# Altium PCB PCB1.pcbdoc
Units mil, origin at the board's own origin, x right, y up, seen from the top; angles counter-clockwise.
Board outline 2782.99 x 3611.5 mil, 2 copper layers (Top Layer, Bottom Layer); 21 components, 41 nets, 137 pads, 9 vias.
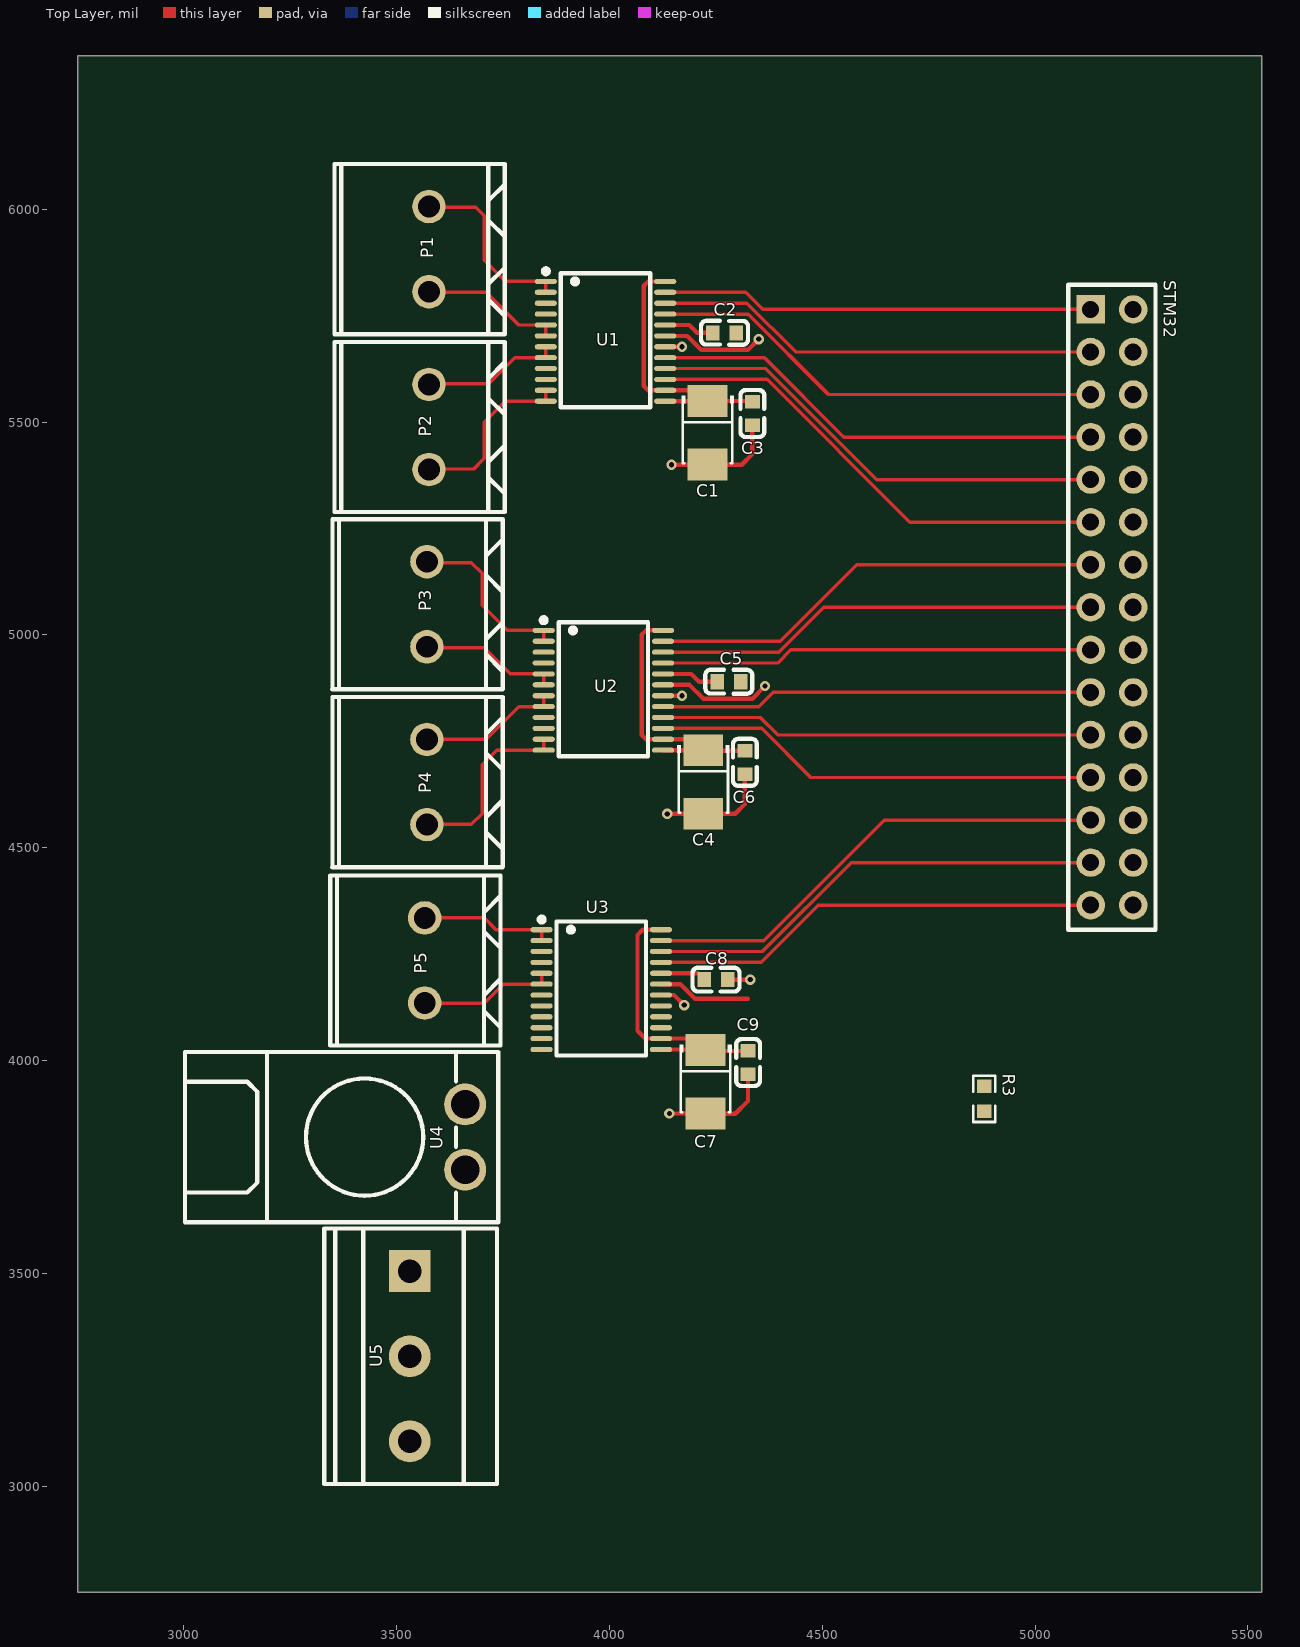
[diagram p0: Top Layer view]
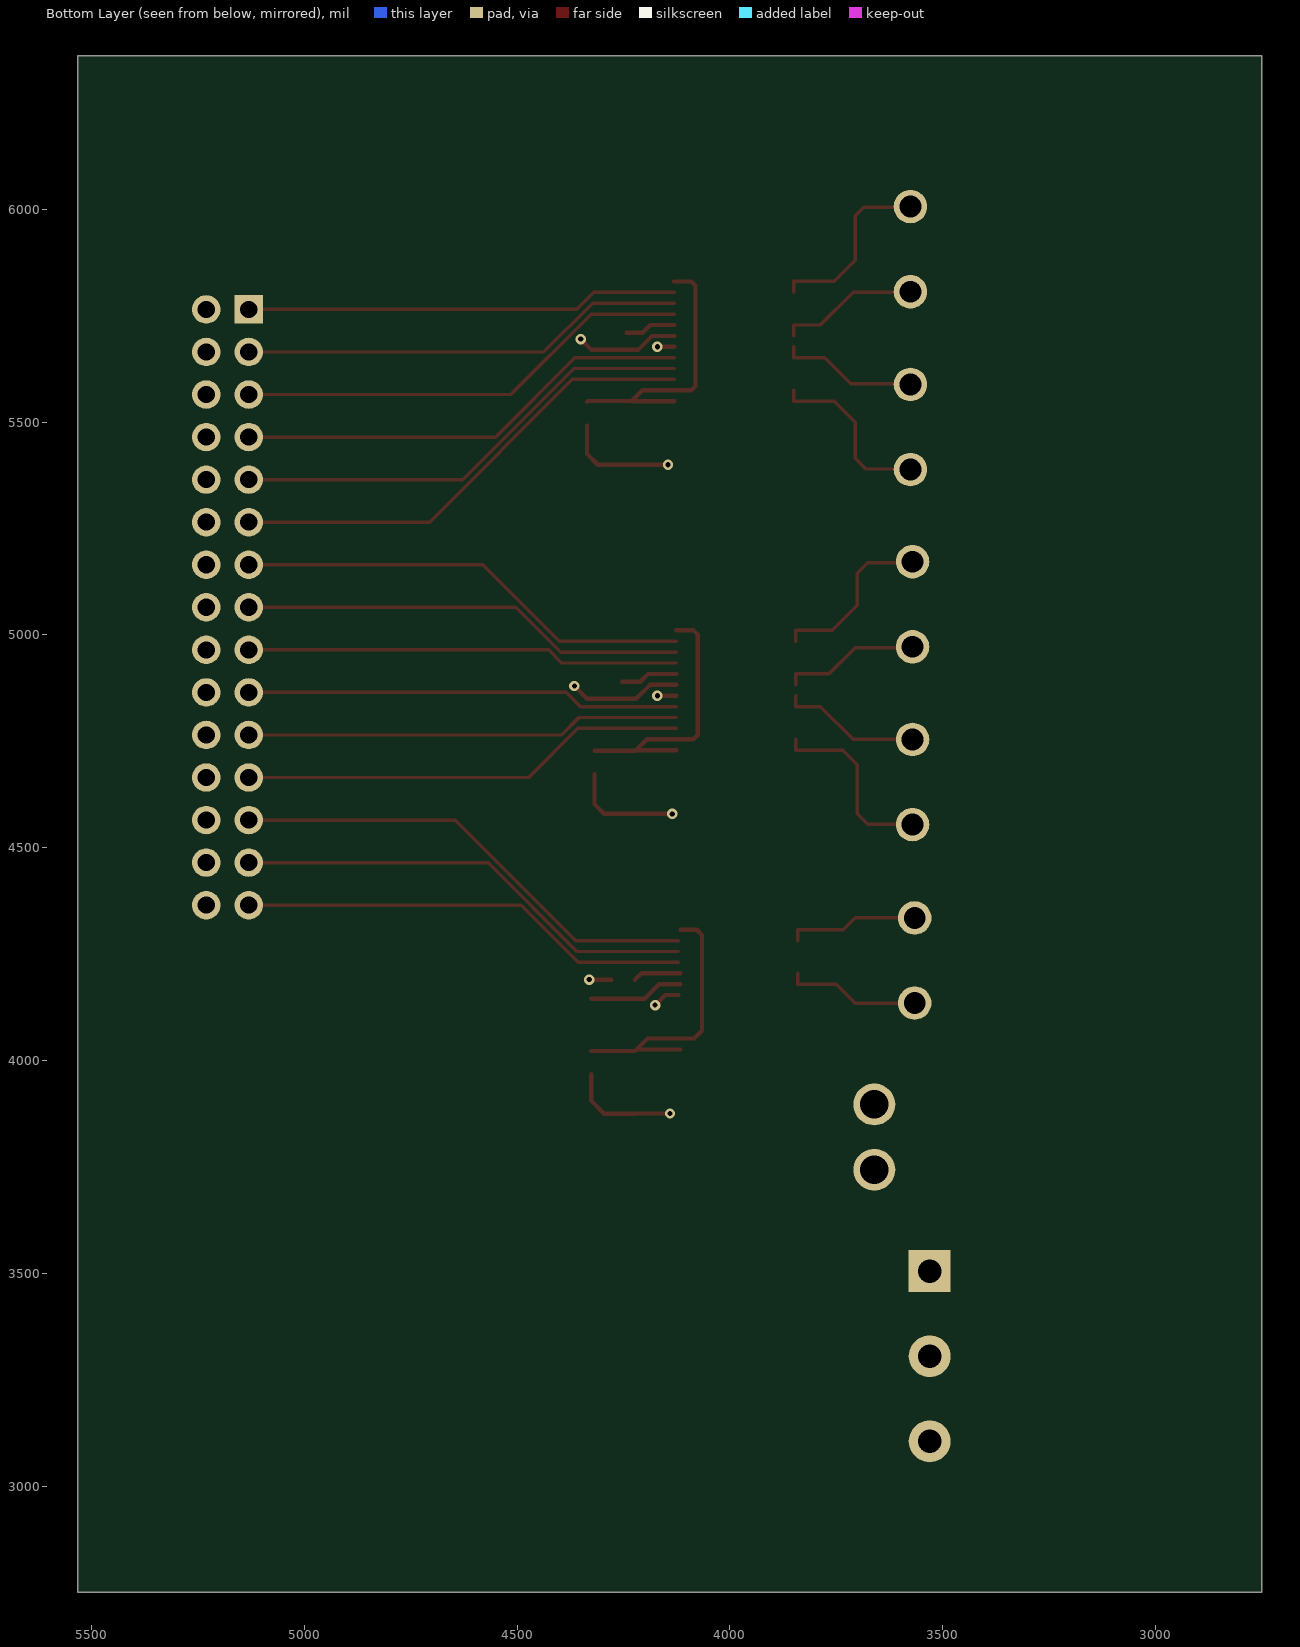
[diagram p1: Bottom Layer view, seen from below]

## Layer stack, top to bottom
Top Layer: signal copper (thickness not stored)
Dielectric: dielectric 12.6, FR-4, Dk 4.8
Bottom Layer: signal copper (thickness not stored)

## Board outline
5532.99,2750 2750,2750 2750,6361.5 5532.99,6361.5

## Components (designator, comment, footprint, x,y, rotation, side; value= is the part's Value field where it differs from the comment)
C1 "TAJB106K025RNJ" CAP-SMD_L3.5-W2.8-R-RD 4230.63,5475 r90 top
C2 "CAP_0603" C0603 4270.63,5710 r0 top
C3 "CAP_0603" C0603 4335.63,5520 r270 top
C4 "TAJB106K025RNJ" CAP-SMD_L3.5-W2.8-R-RD 4220.38,4654.44 r90 top
C5 "CAP_0603" C0603 4280.63,4890 r0 top
C6 "CAP_0603" C0603 4318.07,4700.49 r270 top
C7 "TAJB106K025RNJ" CAP-SMD_L3.5-W2.8-R-RD 4225.63,3950 r90 top
C8 "CAP_0603" C0603 4250.63,4190 r0 top
C9 "CAP_0603" C0603 4325.63,3995 r270 top
P1 "WJ500V-5.08-2P" CONN-TH_2P-P5.00_WJ500V-5.08-2P 3575.83,5906.5 r90 top
P2 "WJ500V-5.08-2P" CONN-TH_2P-P5.00_WJ500V-5.08-2P 3575.83,5488.67 r90 top
P3 "WJ500V-5.08-2P" CONN-TH_2P-P5.00_WJ500V-5.08-2P 3570.83,5072.17 r90 top
P4 "WJ500V-5.08-2P" CONN-TH_2P-P5.00_WJ500V-5.08-2P 3570.83,4654.33 r90 top
P5 "WJ500V-5.08-2P" CONN-TH_2P-P5.00_WJ500V-5.08-2P 3565.83,4235 r90 top
R3 "Res_0603" R0603 4880.63,3910 r270 top
STM32 "PM254-2-15-Z-8.5" HDR-TH_30P-P2.54-V-F-R2-C15-S2.54-2 5180.63,5065 r270 top
U1 "TB6612FNG,C,8,EL" SSOP-24_L8.3-W5.6-P0.65-LS7.6-BL 3990.63,5690 r270 top
U2 "TB6612FNG,C,8,EL" SSOP-24_L8.3-W5.6-P0.65-LS7.6-BL 3985.63,4870 r270 top
U3 "TB6612FNG,C,8,EL" SSOP-24_L8.3-W5.6-P0.65-LS7.6-BL 3980.63,4166.61 r270 top
U4 "DB136HA-10.16-1P-S" CONN-TH_DIBO_DB136HA-10.16-1P-S 3660.63,3820 r270 top
U5 "XY128V-A-5.08-3P" CONN-TH_XY128V-A-5.08-3P 3530.63,3305 r270 top

## Footprints (in the part's own frame and the unit in brackets; to place one, negate y for a bottom-side part, rotate by r counter-clockwise, add the part's x,y. Pads: shape width x height; smd on the part's side, far side on the other; paste and mask are expansions set on the pad)
C0603 [mm]
  rect 0.8x0.9 smd: 1(-0.7,0) 2(0.7,0)
  silkscreen extent -1.41,-0.71 1.39,0.72
CAP-SMD_L3.5-W2.8-R-RD [mm]
  rect 1.9x2.376 smd: 1(1.899,0) 2(-1.899,0)
  silkscreen extent -1.83,-1.55 2.21,1.55
CONN-TH_2P-P5.00_WJ500V-5.08-2P [mm]
  round 2 hole 1.3: 1(-2.54,0) 2(2.54,0)
  silkscreen extent -5.08,-4.52 5.08,5.64
CONN-TH_DIBO_DB136HA-10.16-1P-S [mm]
  round 2.5 hole 1.7: 1(-1.95,0) 2(1.95,0)
  silkscreen extent -5.08,-16.72 5.08,1.98
CONN-TH_XY128V-A-5.08-3P [mm]
  rect 2.5x2.5 hole 1.4: 1(-5.08,0)
  round 2.5 hole 1.4: 2(0,0) 3(5.08,0)
  silkscreen extent -7.62,-5.1 7.62,5.2
HDR-TH_30P-P2.54-V-F-R2-C15-S2.54-2 [mm]
  rect 1.7x1.7 hole 1.02: 1(-17.78,-1.27)
  round 1.7 hole 1.02: 2(-17.78,1.27) 3(-15.24,-1.27) 4(-15.24,1.27) 5(-12.7,-1.27) 6(-12.7,1.27) 7(-10.16,-1.27) 8(-10.16,1.27) 9(-7.62,-1.27) 10(-7.62,1.27) 11(-5.08,-1.27) 12(-5.08,1.27) 13(-2.54,-1.27) 14(-2.54,1.27) 15(0,-1.27) 16(0,1.27) 17(2.54,-1.27) 18(2.54,1.27) 19(5.08,-1.27) 20(5.08,1.27) 21(7.62,-1.27) 22(7.62,1.27) 23(10.16,-1.27) 24(10.16,1.27) 25(12.7,-1.27) 26(12.7,1.27) 27(15.24,-1.27) 28(15.24,1.27) 29(17.78,-1.27) 30(17.78,1.27)
  silkscreen extent -19.25,-2.6 19.25,2.6
R0603 [mil]
  rect 31.75x34.02 smd: 1(-29.66,0) 2(29.66,0)
  silkscreen extent -55,-26 55,26
SSOP-24_L8.3-W5.6-P0.65-LS7.6-BL [mil]
  oval 12.13x52.13 smd: 1(-140.75,-140.24) 2(-115.16,-140.24) 3(-89.57,-140.24) 4(-63.98,-140.24) 5(-38.39,-140.24) 6(-12.79,-140.24) 7(12.8,-140.24) 8(38.39,-140.24) 9(63.98,-140.24) 10(89.57,-140.24) 11(115.16,-140.24) 12(140.75,-140.24) 13(140.75,140.24) 14(115.16,140.24) 15(89.57,140.24) 16(63.98,140.24) 17(38.39,140.24) 18(12.8,140.24) 19(-12.79,140.24) 20(-38.39,140.24) 21(-63.98,140.24) 22(-89.57,140.24) 23(-115.16,140.24) 24(-140.75,140.24)
  silkscreen extent -171,-146 155,105

## Via types
v1: diameter 24, hole 12, Top Layer to Bottom Layer, 9 vias

## Nets (pads, with @x,y where several pads share a name; then routed paths per layer and width w, separated by ;. In a path a pad name is that pad's centre, name@x,y a point inside that pad or via, vN(x,y) a via of type N, cw(c..) or ccw(c..) an arc to the next point about the centre after c; other vN are vias at no path point)
1AIN1: STM32.5 U1.21 | length 1078
  Top Layer w8: U1.21 4325.59,5753.98 4514.57,5565 STM32.5
1AIN2: STM32.3 U1.22 | length 1047.2
  Top Layer w8: U1.22 4322.63,5779.57 4437.2,5665 STM32.3
1AO1: P1.2 U1.1 U1.2 | length 434.5
  Top Layer w8: P1.2 3577.33,6005 3685.63,6005 3705.63,5985 3705.63,5880 3754.88,5830.75 U1.1 U1.2
1AO2: P1.1 U1.5 U1.6 | length 332.5
  Top Layer w8: P1.1 3577.33,5805 3710.63,5805 3787.24,5728.39 U1.5 U1.6
1BIN1: STM32.7 U1.17 | length 1077.1
  Top Layer w8: U1.17 4364.28,5651.61 4550.89,5465 STM32.7
1BIN2: STM32.9 U1.16 | length 1107.9
  Top Layer w8: U1.16 4367.24,5626.02 4628.26,5365 STM32.9
1BO1: P2.1 U1.11 U1.12 | length 416.5
  Top Layer w8: P2.1 3577.16,5390 3680.63,5390 3705.63,5415 3705.63,5500 3754.88,5549.25 U1.12 U1.11
1BO2: P2.2 U1.7 U1.8 | length 326.2
  Top Layer w8: P2.2 3577.16,5590 3715.63,5590 3777.24,5651.61 U1.8 U1.7
1PWMA: STM32.1 U1.23 | length 1016.4
  Top Layer w8: U1.23 4319.67,5805.16 4359.83,5765 STM32.1
1PWMB: STM32.11 U1.15 | length 1138.7
  Top Layer w8: U1.15 4370.2,5600.43 4705.63,5265 STM32.11
2AIN1: STM32.17 U2.21 | length 1017.6
  Top Layer w8: U2.21 4394.87,4933.98 4425.89,4965 STM32.17
2AIN2: STM32.15 U2.22 | length 1048.4
  Top Layer w8: U2.22 4397.83,4959.57 4503.26,5065 STM32.15
2AO1: P3.2 U2.1 U2.2 | length 410.9
  Top Layer w8: P3.2 3573,5170 3675.63,5170 3700.63,5145 3700.63,5070 3759.88,5010.75 U2.1 U2.2
2AO2: P3.1 U2.5 U2.6 | length 326.6
  Top Layer w8: P3.1 3573,4970 3705.63,4970 3767.24,4908.39 U2.5 U2.6
2BIN1: STM32.19 U2.17 | length 1018.6
  Top Layer w8: U2.17 4351.18,4831.61 4384.57,4865 STM32.19
2BIN2: STM32.21 U2.16 | length 1021.8
  Top Layer w8: U2.16 4354.61,4806.02 4395.63,4765 STM32.21
2BO1: P4.1 U2.11 U2.12 | length 440
  Top Layer w8: P4.1 3571.5,4555 3675.63,4555 3700.63,4580 3700.63,4695 3734.88,4729.25 U2.12 U2.11
2BO2: P4.2 U2.7 U2.8 | length 332.2
  Top Layer w8: P4.2 3571.5,4755 3710.63,4755 3787.24,4831.61 U2.8 U2.7
2PWMA: STM32.13 U2.23 | length 1079.3
  Top Layer w8: U2.23 4400.79,4985.16 4580.63,5165 STM32.13
2PWMB: STM32.23 U2.15 | length 1052.6
  Top Layer w8: U2.15 4357.57,4780.43 4473,4665 STM32.23
3V3: C2.1 C5.1 C8.1 STM32.28 U1.20 U2.20 U3.20 | length 368
  Top Layer w10: U3.20@4115.87,4205 4208.07,4205 C8.1 ; U2.20 4192.24,4908.39 4210.63,4890 C5.1 ; U1.20 4187.24,5728.39 4205.63,5710 C2.1
$4N342: STM32.12
$4N344: STM32.14
$4N346: STM32.16
$4N348: STM32.18
$4N350: STM32.20
$4N352: STM32.22
$4N354: STM32.24
AIN1: STM32.29 U3.21 | length 1065.4
  Top Layer w8: U3.21 4356.48,4230.59 4490.89,4365 STM32.29
AIN2: STM32.27 U3.22 | length 1096.3
  Top Layer w8: U3.22 4359.44,4256.18 4568.26,4465 STM32.27
AO1: P5.2 U3.1 U3.2 | length 311.6
  Top Layer w8: P5.2 3705.63,4335 3733.27,4307.36 U3.1 U3.2
AO2: P5.1 U3.5 U3.6 | length 318.6
  Top Layer w8: P5.1 3705.63,4135 3750.03,4179.4 U3.6 U3.5
GND: C1.2 C2.2 C3.2 C4.2 C5.2 C6.2 C7.2 C8.2 C9.2 STM32.30 U1.3 U1.4 U1.9 U1.10 U1.18 U2.3 U2.4 U2.9 U2.10 U2.18 U3.3 U3.4 U3.9 U3.10 U3.18 | length 992.1
  Top Layer w10: U3.18 4151.82,4153.81 v1(4175.63,4130) ; U2.18 v1(4170.63,4857.2) ; U1.18 v1(4170.63,5677.2) ; v1(4135.63,4579.69) C4.2 4220.69,4580 4295.63,4580 4318.07,4602.44 C6.2 ; v1(4140.63,3875.25) C7.2 4225.88,3875 4295.63,3875 4325.63,3905 C9.2 ; v1(4145.63,5400) C1.2@4230.88,5400 ; C1.2 C1.2@4230.88,5400 ; C8.2 v1(4330.63,4190) ; C3.2 4335.63,5425 4310.63,5400 C1.2@4230.88,5400
PB0: STM32.6 U5.1
PB1: STM32.4 U4.1 U4.2
PC1: STM32.8 U5.2
PC2: STM32.10 U5.3
PWMA: STM32.25 U3.23 | length 1127.1
  Top Layer w8: U3.23 4362.4,4281.77 4645.63,4565 STM32.25
STBY: R3.1 STM32.2 U1.19 U2.19 U3.19 | length 733.5
  Top Layer w10: U3.19@4115.87,4179.4 4166.23,4179.4 4200.63,4145 4325.63,4145 ; U2.19 4187.84,4882.79 4220.63,4850 4335.63,4850 v1(4365.63,4880) ; U1.19 4182.84,5702.79 4215.63,5670 4325.63,5670 v1(4350.63,5695)
VM: C1.1 C3.1 C4.1 C6.1 C7.1 C9.1 R3.2 STM32.26 U1.13 U1.14 U1.24 U2.13 U2.14 U2.24 U3.13 U3.14 U3.24 | length 1966.6
  Top Layer w10: U3.13@4115.87,4025.86 C7.1@4219.52,4025.86 ; U3.24@4115.87,4307.36 4077.99,4307.36 4065.63,4295 4065.63,4070 4084.18,4051.45 U3.14 4193.93,4051.45 C7.1@4219.52,4025.86 ; U2.13 C4.1@4220.32,4729.25 ; U2.24 4085.63,5010.75 4075.63,5000.75 4075.63,4765 4085.63,4755 4125.71,4755 U2.14 4194.73,4754.84 C4.1@4220.32,4729.25 ; U1.13 4230.13,5549.25 C1.1 ; U1.24 4090.63,5830.75 4080.63,5820.75 4080.63,5585 4090.63,5575 4130.71,5575 U1.14 4205.54,5574.84 C1.1 ; C6.1 4221.52,4728.05 C4.1@4220.32,4729.25 ; C9.1 4222.82,4022.56 C7.1@4219.52,4025.86 ; C3.1 4333.44,5549.75 C1.1
"": U3.7 U3.8 U3.11 U3.12 U3.15 U3.16 U3.17